# Altium PCB STC最小系统板2.PCBDOC
Units mm, origin at the board's own origin, x right, y up, seen from the top; angles counter-clockwise.
Board outline 50 x 70 mm, 2 copper layers (Top Layer, Bottom Layer); 17 components, 39 nets, 137 pads, 4 vias.
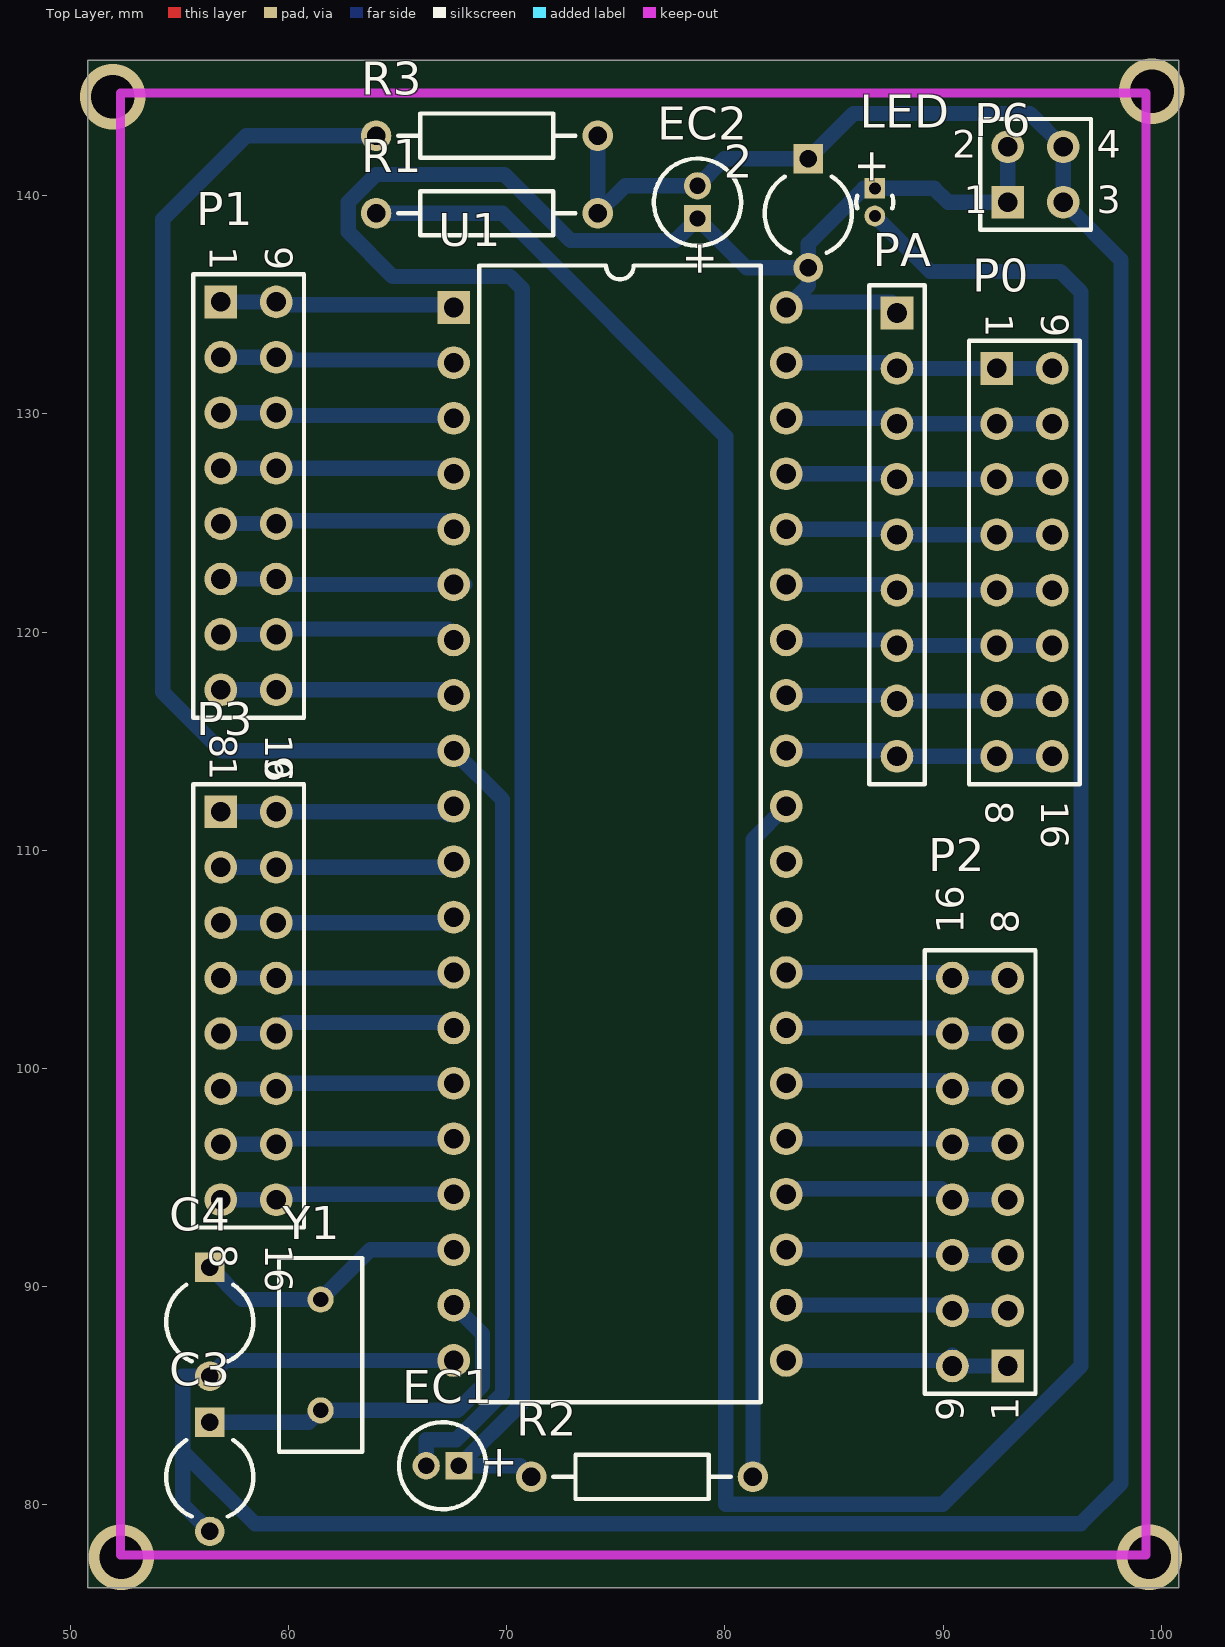
[diagram p0: Top Layer view]
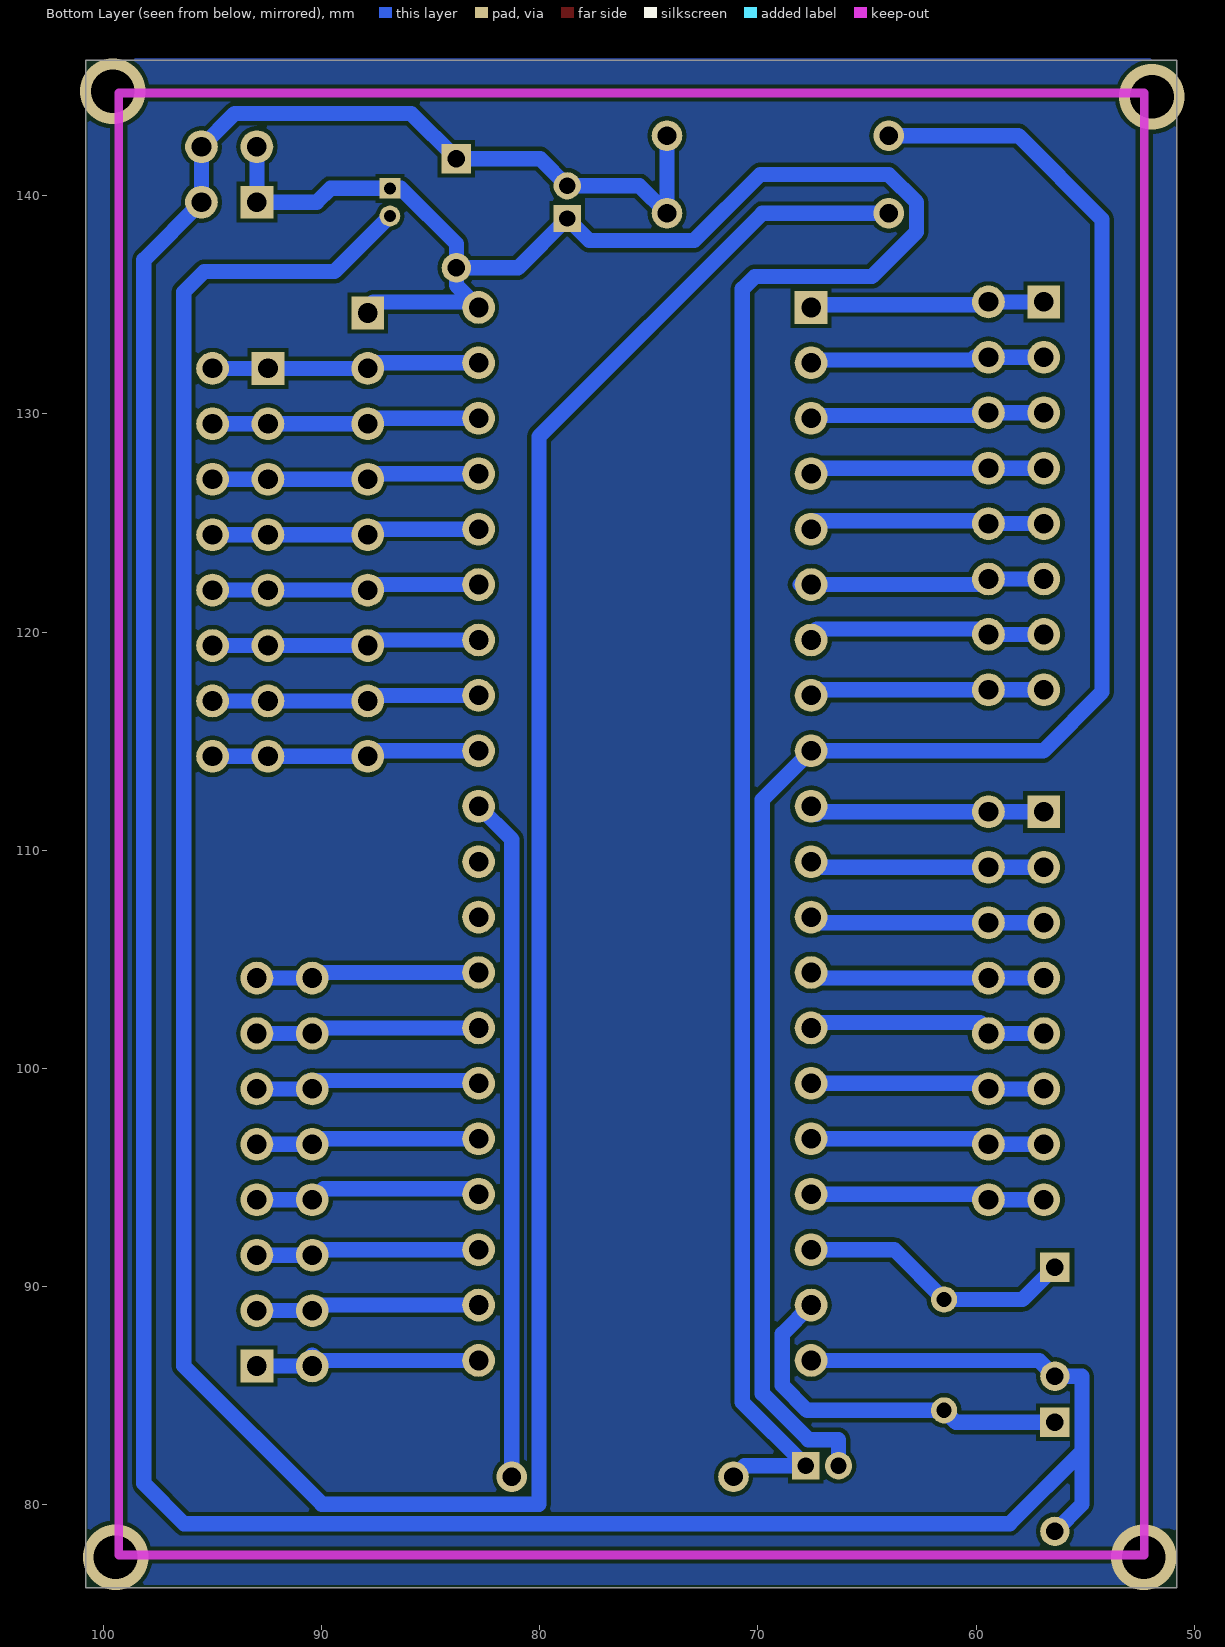
[diagram p1: Bottom Layer view, seen from below]

## Layer stack, top to bottom
Top Layer: signal copper 0.0356
Dielectric: dielectric 0.32, FR-4, Dk 4.8
Bottom Layer: signal copper 0.0356

## Board outline
50.8,76.2 100.8,76.2 100.8,146.2 50.8,146.2

## Design rules (kind name [scope] priority, off if disabled: settings)
Clearance [All] p1: gap=0.2
ComponentClearance [All] p1: gap=0.254 collisioncheckmode=0
PolygonConnect [All] p1: connectstyle=Relief reliefconductorwidth=0.254 reliefentries=4 polygonreliefangle="90 Angle"
RoutingLayers [All] p1: top layer_v5=FALSE bottom layer_v5=TRUE
RoutingVias [All] p1: holewidth=0.8 width=1.5 viastyle="Through Hole" minholewidth=0.711 minwidth=1.27 maxholewidth=0.711 maxwidth=1.27
SolderMaskExpansion [All] p1: expansion=0.102
TestPointUsage [All] p1: valid=0 allowmultiple=FALSE
Testpoint [All] p1: side=15 testpointundercomponent=TRUE minsize=1.016 maxsize=2.54 preferedsize=1.524 minholesize=0 maxholesize=1.016 preferedholesize=0.813 testpointgrid=0.025 style=1023 order=-539222988
Width [All] p1: maxlimit=0.8 minlimit=0.6 preferedwidth=0.7
16 further rules are at their usual default settings.

## Components (designator, comment, footprint, x,y, rotation, side; value= is the part's Value field where it differs from the comment)
2 "Cap Semi" CAPR5-4X5 83.82,139.192 r270 top
C3 "Cap Semi" CAPR5-4X5 56.388,81.28 r270 top
C4 "Cap Semi" CAPR5-4X5 56.388,88.392 r270 top
EC1 "Cap Pol1" CAPPR1.5-4x5 67.056,81.788 r180 top
EC2 "Cap Pol1" CAPPR1.5-4x5 78.74,139.7 r90 top
LED "LED0" CAPPR1.27-1.7x2.8 86.868,139.7 r270 top
P0 "Header 8X2A" HDR2X8_CEN 92.456,132.08 r270 top
P1 "Header 8X2A" HDR2X8_CEN 56.896,135.128 r270 top
P2 "Header 8X2A" HDR2X8_CEN 92.964,86.36 r90 top
P3 "Header 8X2A" HDR2X8_CEN 56.896,111.76 r270 top
P6 "MHDR2X2" HDR2X2 92.964,139.7 r0 top
PA "Header 9" HDR1X9 87.884,134.62 r270 top
R1 "Res2" AXIAL-0.4 69.088,139.192 r0 top
R2 "Res2" AXIAL-0.4 76.2,81.28 r180 top
R3 "Res2" AXIAL-0.4 69.088,142.748 r0 top
U1 "AT89C51RC" DIP-40 75.184,110.744 r270 top
Y1 "XTAL" RAD-0.2 61.468,86.868 r90 top

## Footprints (in the part's own frame and the unit in brackets; to place one, negate y for a bottom-side part, rotate by r counter-clockwise, add the part's x,y. Pads: shape width x height; smd on the part's side, far side on the other; paste and mask are expansions set on the pad)
AXIAL-0.4 [mm] "Resistor; 2 Leads"
  round 1.4 hole 0.85: 1(-5.08,0) 2(5.08,0)
  silkscreen extent -4.06,-1.02 4.06,1.02
CAPPR1.5-4x5 [mm] "Capacitor, Electrolytic, Radial; Body 4 x 5 mm (Dia.xH typ); Pin Spacing 1.5 mm (typ)"
  rect 1.25x1.25 hole 0.75: 1(-0.75,0)
  round 1.25 hole 0.75: 2(0.75,0)
  silkscreen extent -2,-2 2,2
CAPPR1.27-1.7x2.8 [mm] "Capacitor, Radial, Tantalum; Body 1.7 x 2.8 mm (Dia.xH max); Pin Spacing 1.27 mm (typ)"
  rect 0.95x0.95 hole 0.55: 1(-0.635,0)
  round 0.95 hole 0.55: 2(0.635,0)
  silkscreen extent -0.29,-0.85 0.29,0.85
CAPR5-4X5 [mm] "Capacitor; 2 Leads"
  rect 1.35x1.35 hole 0.8: 1(-2.5,0)
  round 1.35 hole 0.8: 2(2.5,0)
  silkscreen extent -1.69,-2 1.82,2
DIP-40 [mm]
  rect 1.5x1.5 hole 0.9: 1(-24.13,-7.62)
  round 1.5 hole 0.9: 2(-21.59,-7.62) 3(-19.05,-7.62) 4(-16.51,-7.62) 5(-13.97,-7.62) 6(-11.43,-7.62) 7(-8.89,-7.62) 8(-6.35,-7.62) 9(-3.81,-7.62) 10(-1.27,-7.62) 11(1.27,-7.62) 12(3.81,-7.62) 13(6.35,-7.62) 14(8.89,-7.62) 15(11.43,-7.62) 16(13.97,-7.62) 17(16.51,-7.62) 18(19.05,-7.62) 19(21.59,-7.62) 20(24.13,-7.62) 21(24.13,7.62) 22(21.59,7.62) 23(19.05,7.62) 24(16.51,7.62) 25(13.97,7.62) 26(11.43,7.62) 27(8.89,7.62) 28(6.35,7.62) 29(3.81,7.62) 30(1.27,7.62) 31(-1.27,7.62) 32(-3.81,7.62) 33(-6.35,7.62) 34(-8.89,7.62) 35(-11.43,7.62) 36(-13.97,7.62) 37(-16.51,7.62) 38(-19.05,7.62) 39(-21.59,7.62) 40(-24.13,7.62)
  silkscreen extent -26.05,-6.45 26.05,6.45
HDR1X9 [mm] "Connector; Header; 9 Position"
  rect 1.5x1.5 hole 0.9: 1(0,0)
  round 1.5 hole 0.9: 2(2.54,0) 3(5.08,0) 4(7.62,0) 5(10.16,0) 6(12.7,0) 7(15.24,0) 8(17.78,0) 9(20.32,0)
  silkscreen extent -1.27,-1.27 21.59,1.27
HDR2X2 [mm] "Connector; Header; 2x2 Position"
  rect 1.5x1.5 hole 0.9: 1(0,0)
  round 1.5 hole 0.9: 2(0,2.54) 3(2.54,0) 4(2.54,2.54)
  silkscreen extent -1.27,-1.27 3.81,3.81
HDR2X8_CEN [mm] "Connector; Header; 8x2 Position"
  rect 1.5x1.5 hole 0.9: 1(0,0)
  round 1.5 hole 0.9: 2(2.54,0) 3(5.08,0) 4(7.62,0) 5(10.16,0) 6(12.7,0) 7(15.24,0) 8(17.78,0) 9(0,2.54) 10(2.54,2.54) 11(5.08,2.54) 12(7.62,2.54) 13(10.16,2.54) 14(12.7,2.54) 15(15.24,2.54) 16(17.78,2.54)
  silkscreen extent -1.27,-1.27 19.05,3.81
RAD-0.2 [mm] "Jumper Wire; 2 Leads"
  round 1.2 hole 0.7: 1(-2.54,0) 2(2.54,0)
  silkscreen extent -4.44,-1.91 4.44,1.91

## Part data
2 C3 C4: "Capacitor (Semiconductor SIM Model)"
EC1 EC2: "Polarized Capacitor (Radial)"
LED: "Typical INFRARED GaAs LED"
P0 P1 P2 P3: "Header, 8-Pin, Dual row"
P6: "Header, 2-Pin, Dual row"
PA: "Header, 9-Pin"
R1 R2 R3: "Resistor"
U1: "8-Bit Microcontroller with 32K Flash ROM"
Y1: "Crystal Oscillator"

## Via types
v1: diameter 3, hole 2, Top Layer to Bottom Layer, 4 vias

## Nets (pads, with @x,y where several pads share a name; then routed paths per layer and width w, separated by ;. In a path a pad name is that pad's centre, name@x,y a point inside that pad or via, vN(x,y) a via of type N, cw(c..) or ccw(c..) an arc to the next point about the centre after c; other vN are vias at no path point)
GND: 2.1 C3.2 C4.2 EC2.2 P6.3 P6.4 R1.2 R3.2 U1.20 | length 155.3
  Bottom Layer w0.7: C3.2 55.143,80.025 55.143,82.448 ; U1.20 57.11,86.614 C4.2 55.143,85.892 55.143,82.448 ; R3.2 R1.2 75.426,140.45 EC2.2 79.982,141.692 2.1 85.892,143.764 93.98,143.764 P6.4 P6.3 98.146,137.058 98.146,80.975 96.3,79.13 58.462,79.13 55.143,82.448
Net2_2: 2.2 EC1.1 EC2.1 LED.1 P6.1 P6.2 PA.1 R2.2 U1.40 | length 115
  Bottom Layer w0.7: R2.2 70.612,81.788 EC1.1 70.714,84.696 70.714,135.727 70.144,136.296 64.77,136.296 62.738,138.328 62.738,139.7 64.008,140.97 69.895,140.97 72.923,137.942 77.732,137.942 EC2.1 80.998,136.692 2.2 ; U1.40@82.931,134.874 U1.40 83.82,135.89 2.2 ; U1.40@82.931,135.128 87.63,135.128 PA.1@88.011,134.747 ; P6.2 P6.1 90.221,139.7 89.586,140.335 LED.1 86.36,140.335 83.82,137.795 2.2
NetC3_1: C3.1 U1.19 Y1.1 | length 17.4
  Bottom Layer w0.7: C3.1 60.92,83.78 Y1.1 67.742,84.328 68.885,85.471 68.885,87.833 U1.19
NetC4_1: C4.1 U1.18 Y1.2 | length 12.7
  Bottom Layer w0.7: C4.1 57.872,89.408 Y1.2 63.754,91.694 U1.18
NetEC1_2: EC1.2 R3.1 U1.9 | length 83.4
  Bottom Layer w0.7: R3.1 58.064,142.748 54.229,138.913 54.229,117.246 56.921,114.554 U1.9 69.799,112.319 69.799,85.09 67.691,82.982 66.306,82.982 EC1.2
NetLED_2: LED.2 R1.1 | length 148.2
  Bottom Layer w0.7: R1.1 69.799,139.192 80.03,128.961 80.03,80.03 89.987,80.03 96.317,86.36 96.317,135.585 95.377,136.525 89.408,136.525 LED.2
NetP0_1: P0.1 P0.9 PA.2 U1.39 | length 12.2
  Bottom Layer w0.7: U1.39 PA.2@87.63,132.334 ; PA.2@87.63,132.08 P0.1 P0.9
NetP0_2: P0.2 P0.10 PA.3 U1.38 | length 12.2
  Bottom Layer w0.7: U1.38 PA.3@87.63,129.794 ; PA.3@87.63,129.54 P0.2 P0.10
NetP0_3: P0.3 P0.11 PA.4 U1.37 | length 11.7
  Bottom Layer w0.7: U1.37 PA.4@87.376,127.254 ; PA.4 P0.3 P0.11
NetP0_4: P0.4 P0.12 PA.5 U1.36 | length 12.6
  Bottom Layer w0.7: U1.36@82.804,125.095 U1.36 PA.5@87.63,124.714 ; PA.5@87.63,124.46 P0.4 P0.12
NetP0_5: P0.5 P0.13 PA.6 U1.35 | length 12.2
  Bottom Layer w0.7: U1.35 PA.6@87.503,122.174 ; PA.6@87.503,121.92 PA.6 P0.5 P0.13
NetP0_6: P0.6 P0.14 PA.7 U1.34 | length 12.2
  Bottom Layer w0.7: U1.34 PA.7@87.63,119.634 ; PA.7@87.63,119.38 P0.6 P0.14
NetP0_7: P0.7 P0.15 PA.8 U1.33 | length 12.2
  Bottom Layer w0.7: U1.33 PA.8@87.63,117.094 ; PA.8@87.63,116.84 P0.7 P0.15
NetP0_8: P0.8 P0.16 PA.9 U1.32 | length 12.2
  Bottom Layer w0.7: U1.32 PA.9@87.63,114.554 ; PA.9@87.63,114.3 P0.8 P0.16
NetP1_1: P1.1 P1.9 U1.1 | length 9.8
  Bottom Layer w0.7: P1.1 P1.9 ; P1.9@59.563,135.001 66.802,135.001
NetP1_2: P1.2 P1.10 U1.2 | length 9.8
  Bottom Layer w0.7: P1.2 P1.10 ; P1.10@60.071,132.588 60.198,132.461 U1.2@67.31,132.461
NetP1_3: P1.3 P1.11 U1.3 | length 10.9
  Bottom Layer w0.7: P1.3 P1.11 P1.11@59.69,129.794 ; P1.11@59.563,130.175 59.817,130.175 60.071,129.921 U1.3@67.437,129.921
NetP1_4: P1.4 P1.12 U1.4 | length 10.3
  Bottom Layer w0.7: P1.4 U1.4@67.183,127.508
NetP1_5: P1.5 P1.13 U1.5 | length 10.5
  Bottom Layer w0.7: P1.5 P1.13 ; P1.13@59.563,125.095 U1.5@67.564,125.095
NetP1_6: P1.6 P1.14 U1.6 | length 11.4
  Bottom Layer w0.7: P1.6 P1.14 ; P1.14@59.182,122.174 U1.6@68.072,122.174
NetP1_7: P1.7 P1.15 U1.7 | length 10.7
  Bottom Layer w0.7: P1.7 P1.15 ; P1.15@59.182,120.142 U1.7@67.31,120.142
NetP1_8: P1.8 P1.16 U1.8 | length 10.7
  Bottom Layer w0.7: P1.8 U1.8@67.564,117.348
NetP2_1: P2.1 P2.9 U1.21 | length 10.3
  Bottom Layer w0.7: U1.21 90.17,86.614 P2.9@90.424,86.868 ; P2.9 P2.1
NetP2_2: P2.2 P2.10 U1.22 | length 9.8
  Bottom Layer w0.7: U1.22 P2.10@90.043,89.154 ; P2.10 P2.2
NetP2_3: P2.3 P2.11 U1.23 | length 9.7
  Bottom Layer w0.7: U1.23 P2.11@89.916,91.694 ; P2.11 P2.3
NetP2_4: P2.4 P2.12 U1.24 | length 9.9
  Bottom Layer w0.7: U1.24@82.55,94.488 P2.12@89.916,94.488 ; P2.12 P2.4
NetP2_5: P2.5 P2.13 U1.25 | length 10.2
  Bottom Layer w0.7: U1.25 P2.13@90.424,96.774 ; P2.13 P2.5
NetP2_6: P2.6 P2.14 U1.26 | length 9.9
  Bottom Layer w0.7: U1.26@83.185,99.441 P2.14@90.551,99.441 ; P2.14 P2.6
NetP2_7: P2.7 P2.15 U1.27 | length 9.9
  Bottom Layer w0.7: U1.27 P2.15@90.17,101.854 ; P2.15 P2.7
NetP2_8: P2.8 P2.16 U1.28 | length 9.9
  Bottom Layer w0.7: U1.28 P2.16@90.17,104.394 ; P2.16 P2.8
NetP3_1: P3.1 P3.9 U1.10 | length 10.5
  Bottom Layer w0.7: P3.1 67.183,111.76 U1.10@67.31,111.633
NetP3_2: P3.2 P3.10 U1.11 | length 10.2
  Bottom Layer w0.7: P3.2 U1.11@67.056,109.22
NetP3_3: P3.3 P3.11 U1.12 | length 10.8
  Bottom Layer w0.7: P3.3 U1.12@67.691,106.68
NetP3_4: P3.4 P3.12 U1.13 | length 10.8
  Bottom Layer w0.7: P3.4 67.31,104.14 U1.13
NetP3_5: P3.5 P3.13 U1.14 | length 10.3
  Bottom Layer w0.7: P3.5 P3.13 ; P3.13@59.817,102.108 U1.14@67.564,102.108
NetP3_6: P3.6 P3.14 U1.15 | length 10.7
  Bottom Layer w0.7: P3.6 P3.14@59.69,99.06 ; P3.14@59.69,99.314 U1.15
NetP3_7: P3.7 P3.15 U1.16 | length 10.4
  Bottom Layer w0.7: P3.7 P3.15 ; P3.15@59.69,96.774 U1.16
NetP3_8: P3.8 P3.16 U1.17 | length 10.7
  Bottom Layer w0.7: P3.8 P3.16 ; P3.16@59.436,94.234 U1.17
NetR2_1: R2.1 U1.31 | length 31.4
  Bottom Layer w0.7: R2.1 81.28,110.49 U1.31
pads on no net: U1.29 U1.30
copper on no net:
  other v1: 52.324,77.597 99.441,77.597 51.943,144.526 99.568,144.78

## Polygon pours and split planes (outlines as drawn)
no net on Bottom Layer (solid): 51.054,146.304 100.711,146.304 100.711,76.327 50.8,76.327 50.8,145.923

## Keep-outs
Keep-Out Layer:
  lines w0.4: 52.3,77.7 99.3,77.7 99.3,144.7 52.3,144.7 52.3,77.7

## Silkscreen, mask and mechanical layers (free items; w line width, h text height)
Drill Drawing:
  text ".LEGEND" at 105.88,81.28 h1.52
  text "Drill Drawing." at 105.88,78.74 h1.52

## Dimensions
52.3,77.7 to 99.3,77.7 on Mechanical 1
52.3,77.7 to 52.3,144.7 on Mechanical 1

## Text inside footprints (layer, text, board x,y; h text height)
EC1: Top Overlay "+" at 70.531,82.538 h1.5 r180
EC2: Top Overlay "+" at 79.49,136.225 h1.5 r90
LED: Top Overlay "+" at 86.118,142.185 h1.5 r270
P0: Top Overlay "16" at 94.488,112.268 h1.27 r270; Top Overlay "8" at 91.948,112.268 h1.27 r270; Top Overlay "1" at 91.948,134.62 h1.27 r270; Top Overlay "9" at 94.488,134.62 h1.27 r270
P1: Top Overlay "16" at 58.928,115.316 h1.27 r270; Top Overlay "8" at 56.388,115.316 h1.27 r270; Top Overlay "1" at 56.388,137.668 h1.27 r270; Top Overlay "9" at 58.928,137.668 h1.27 r270
P2: Top Overlay "16" at 90.932,106.172 h1.27 r90; Top Overlay "8" at 93.472,106.172 h1.27 r90; Top Overlay "1" at 93.472,83.82 h1.27 r90; Top Overlay "9" at 90.932,83.82 h1.27 r90
P3: Top Overlay "16" at 58.928,91.948 h1.27 r270; Top Overlay "8" at 56.388,91.948 h1.27 r270; Top Overlay "1" at 56.388,114.3 h1.27 r270; Top Overlay "9" at 58.928,114.3 h1.27 r270
P6: Top Overlay "1" at 90.932,139.192 h1.27; Top Overlay "2" at 90.424,141.732 h1.27; Top Overlay "4" at 97.028,141.732 h1.27; Top Overlay "3" at 97.028,139.192 h1.27